# Altium PCB led1.PcbDoc
Units mil, origin at the board's own origin, x right, y up, seen from the top; angles counter-clockwise.
Board outline 6000 x 4000 mil, 2 copper layers (Top Layer, Bottom Layer); 26 components, 52 nets, 165 pads, 0 vias.
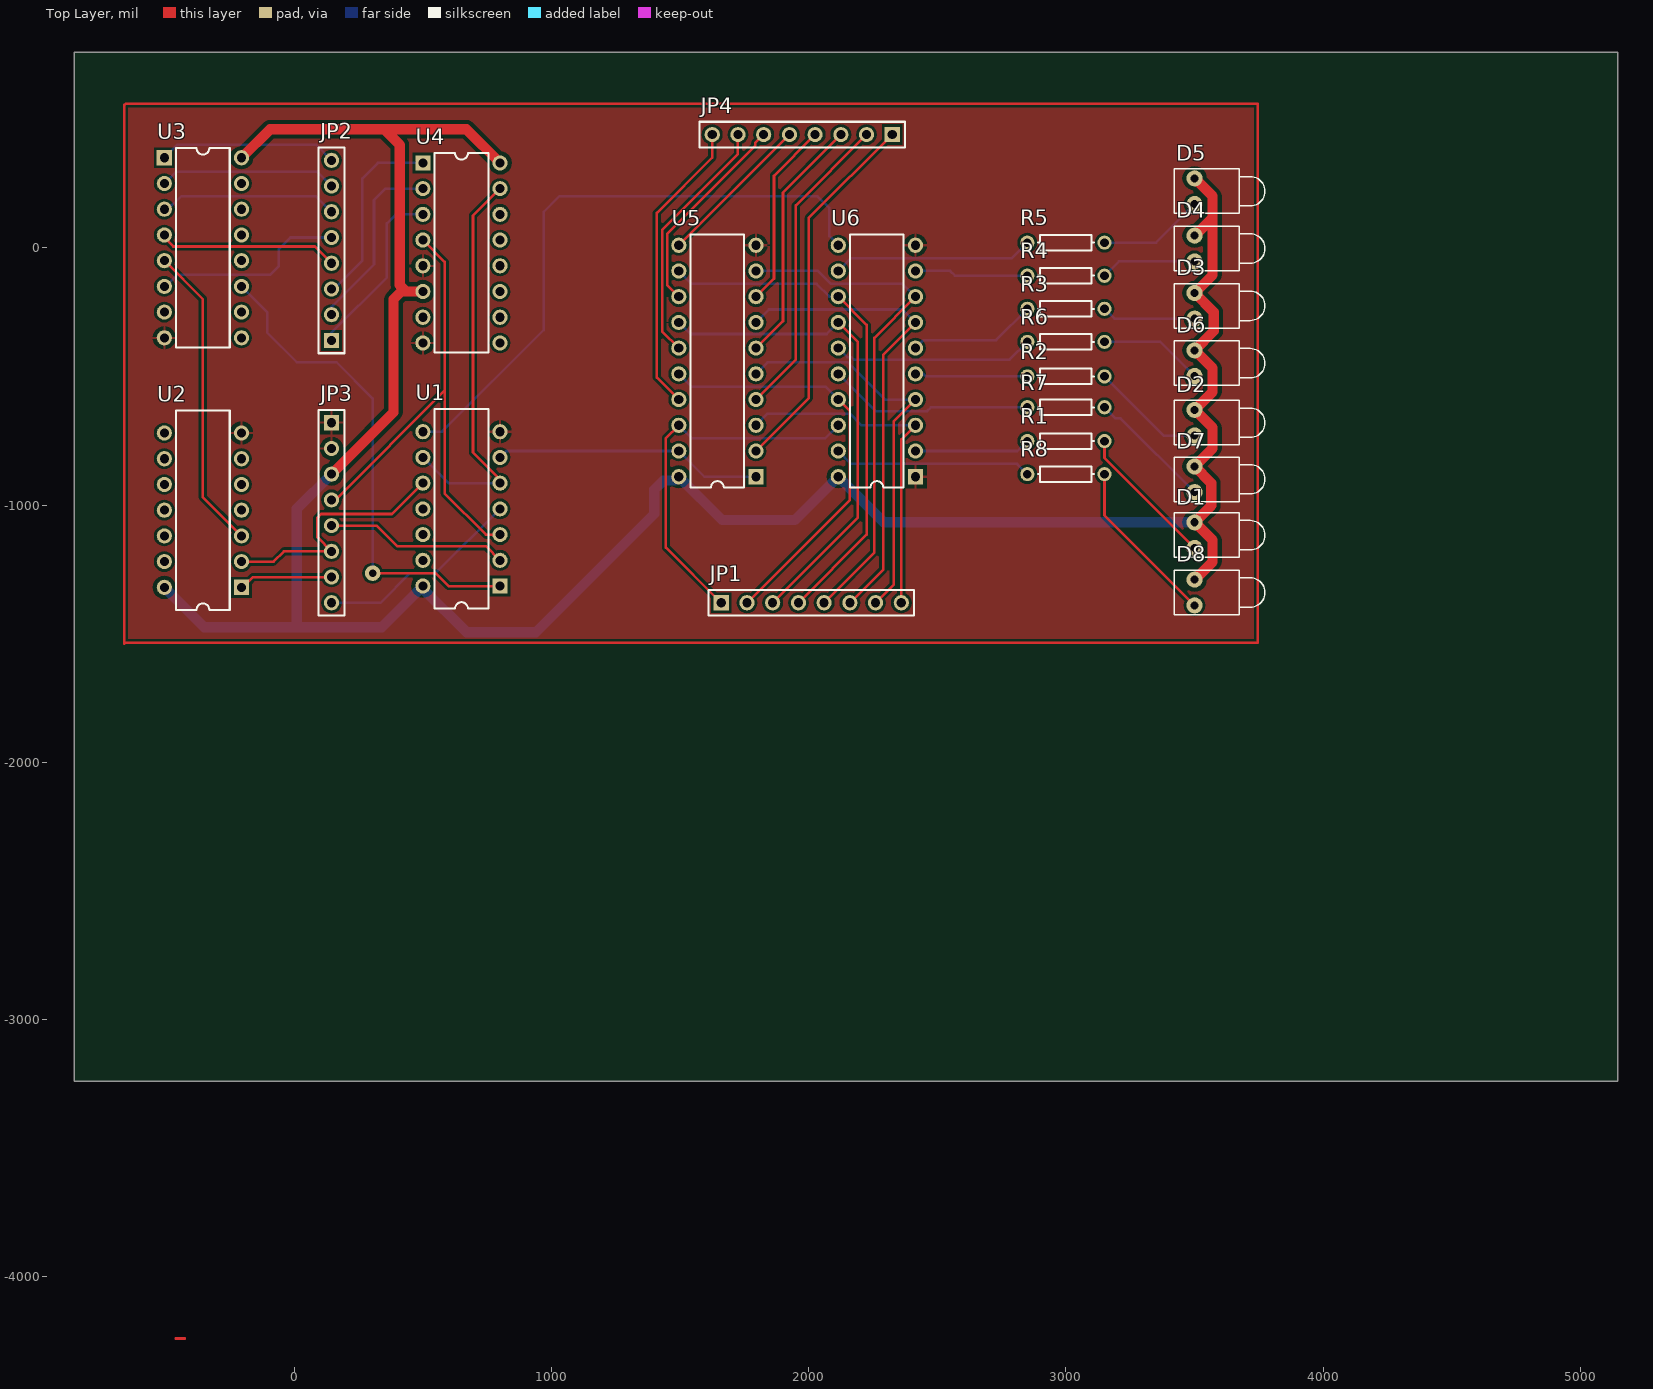
[diagram p0: Top Layer view]
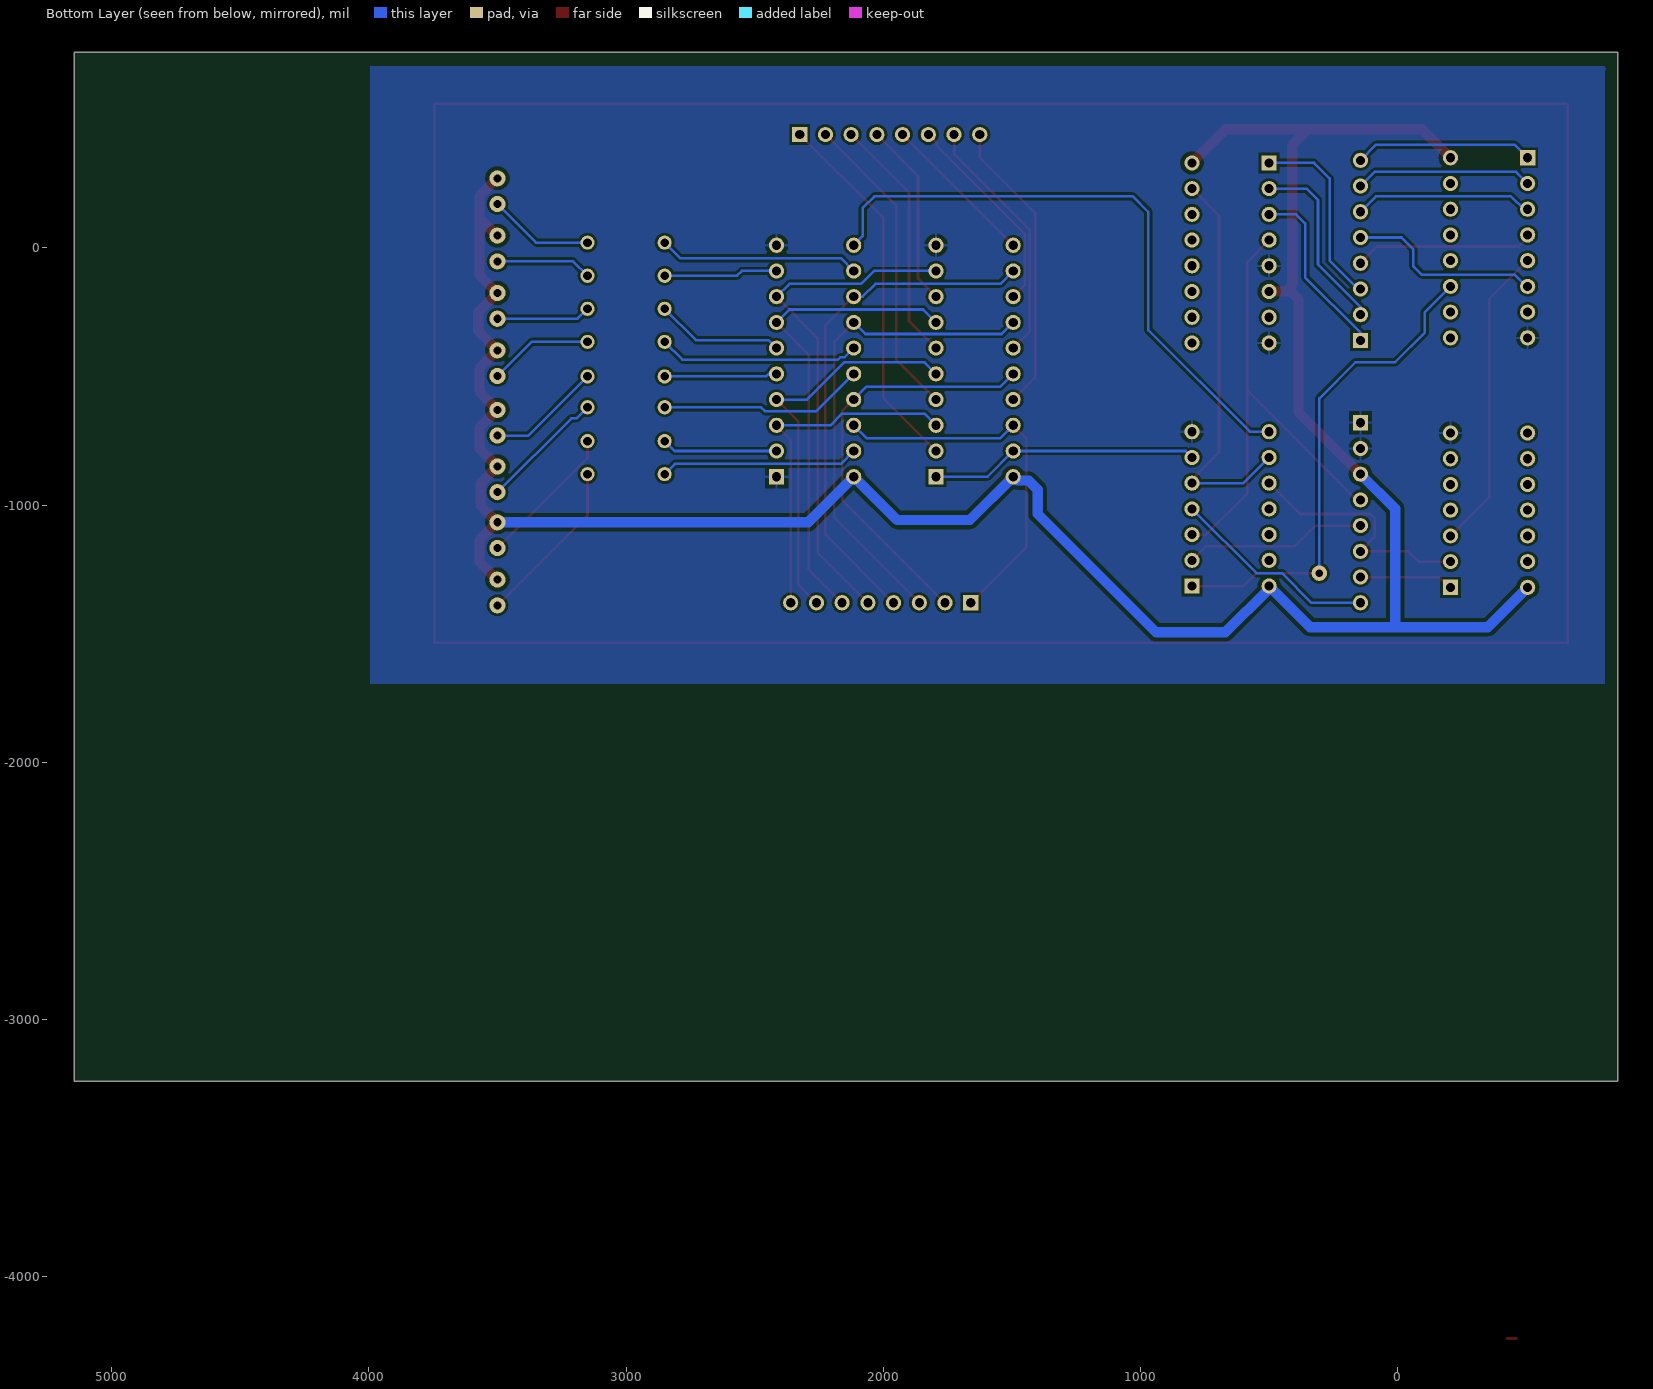
[diagram p1: Bottom Layer view, seen from below]

## Layer stack, top to bottom
Top Layer: signal copper 1.4
Dielectric: dielectric 12.6, FR-4, Dk 4.8
Bottom Layer: signal copper 1.4

## Board outline
-855,-3240 5145,-3240 5145,760 -855,760

## Design rules (kind name [scope] priority, off if disabled: settings)
Clearance vcc.c [InNetClass('vcc,gnd') vs InNetClass('vcc,gnd')] p1: gap=15
Clearance [All] p2: gap=10
ComponentClearance [All] p1: gap=10 collisioncheckmode=0
PolygonConnect [All] p1: connectstyle=Relief reliefconductorwidth=10 reliefentries=4 polygonreliefangle="90 Angle"
RoutingVias [All] p1: holewidth=28 width=50 viastyle="Through Hole" minholewidth=28 minwidth=50 maxholewidth=28 maxwidth=50
SolderMaskExpansion [All] p1: expansion=4
TestPointUsage [All] p1: valid=0 allowmultiple=FALSE
Testpoint [All] p1: side=15 testpointundercomponent=TRUE minsize=40 maxsize=100 preferedsize=60 minholesize=0 maxholesize=40 preferedholesize=32 testpointgrid=1 style=1023 order=1234567890
Width vcc [InNetClass('vcc,gnd')] p1: maxlimit=50 minlimit=30 preferedwidth=40
Width [All] p2: maxlimit=10 minlimit=10 preferedwidth=10
17 further rules are at their usual default settings.

## Classes and differential pairs
net class vcc,gnd: GND VCC
net class A[2..9]: A2 A3 A4 A5 A6 A7 A8 A9
net class D[0..7]: D0 D1 D2 D3 D4 D5 D6 D7
net class OUT[0..7]: OUT0 OUT1 OUT2 OUT3 OUT4 OUT5 OUT6 OUT7
net class SW[0..7]: SW0 SW1 SW2 SW3 SW4 SW5 SW6 SW7

## Components (designator, comment, footprint, x,y, rotation, side; value= is the part's Value field where it differs from the comment)
D1 "LED1" LED-1 3500,-1117.14 r0 top
D2 "LED1" LED-1 3500,-680 r0 top
D3 "LED1" LED-1 3500,-225.71 r0 top
D4 "LED1" LED-1 3500,-2.86 r0 top
D5 "LED1" LED-1 3500,220 r0 top
D6 "LED1" LED-1 3500,-448.57 r0 top
D7 "LED1" LED-1 3500,-900 r0 top
D8 "LED1" LED-1 3500,-1340 r0 top
JP1 "Header 8" HDR1X8 1660,-1380 r0 top
JP2 "Header 8" HDR1X8 145,-360 r90 top
JP3 "Header 8" HDR1X8 145,-680 r270 top
JP4 "Header 8" HDR1X8 2325,440 r180 top
R1 "Res1" AXIAL-0.3 3000,-751.43 r0 top
R2 "Res1" AXIAL-0.3 3000,-500 r180 top
R3 "Res1" AXIAL-0.3 3000,-237.14 r180 top
R4 "Res1" AXIAL-0.3 3000,-108.57 r180 top
R5 "Res1" AXIAL-0.3 3000,20 r180 top
R6 "Res1" AXIAL-0.3 3000,-365.71 r180 top
R7 "Res1" AXIAL-0.3 3000,-620 r180 top
R8 "Res1" AXIAL-0.3 3000,-880 r180 top
U1 "SN74LS32N" N014 650,-1015 r90 top
U2 "SN74LS08N" N014 -355,-1020 r90 top
U3 "SN74LS138N" N016 -355,0 r270 top
U4 "SN74LS138N" N016 650,-20 r270 top
U5 "SN74LS244N" N020 1645,-440 r90 top
U6 "SN74LS374N" N020D 2265,-440 r90 top

## Footprints (in the part's own frame and the unit in brackets; to place one, negate y for a bottom-side part, rotate by r counter-clockwise, add the part's x,y. Pads: shape width x height; smd on the part's side, far side on the other; paste and mask are expansions set on the pad)
AXIAL-0.3 [mm] "Resistor; 2 Leads"
  round 1.4 hole 0.85: 1(-3.81,0) 2(3.81,0)
  silkscreen extent -2.77,-0.76 2.77,0.76
HDR1X8 [mm] "Connector; Header; 8 Position"
  rect 1.5x1.5 hole 0.9: 1(0,0)
  round 1.5 hole 0.9: 2(2.54,0) 3(5.08,0) 4(7.62,0) 5(10.16,0) 6(12.7,0) 7(15.24,0) 8(17.78,0)
  silkscreen extent -1.27,-1.27 19.05,1.27
LED-1 [mm] "Typical RED GaAs LED; 2 Leads"
  round 1.6 hole 0.8: 1(0,1.27) 2(0,-1.27)
  silkscreen extent -2,-2.2 6.95,2.2
N014 [mm] "DIP; 14 Leads; Row Spacing 7.62 mm; Pitch 2.54 mm"
  rect 1.5x1.5 hole 0.9: 1(-7.62,-3.81)
  round 1.5 hole 0.9: 2(-5.08,-3.81) 3(-2.54,-3.81) 4(0,-3.81) 5(2.54,-3.81) 6(5.08,-3.81) 7(7.62,-3.81) 8(7.62,3.81) 9(5.08,3.81) 10(2.54,3.81) 11(0,3.81) 12(-2.54,3.81) 13(-5.08,3.81) 14(-7.62,3.81)
  silkscreen extent -9.85,-2.65 9.85,2.65
N016 [mm] "DIP; 16 Leads; Row Spacing 7.62 mm; Pitch 2.54 mm"
  rect 1.5x1.5 hole 0.9: 1(-8.89,-3.81)
  round 1.5 hole 0.9: 2(-6.35,-3.81) 3(-3.81,-3.81) 4(-1.27,-3.81) 5(1.27,-3.81) 6(3.81,-3.81) 7(6.35,-3.81) 8(8.89,-3.81) 9(8.89,3.81) 10(6.35,3.81) 11(3.81,3.81) 12(1.27,3.81) 13(-1.27,3.81) 14(-3.81,3.81) 15(-6.35,3.81) 16(-8.89,3.81)
  silkscreen extent -9.85,-2.65 9.85,2.65
N020 [mm] "DIP; 20 Leads; Row Spacing 7.62 mm; Pitch 2.54 mm"
  rect 1.5x1.5 hole 0.9: 1(-11.43,-3.81)
  round 1.5 hole 0.9: 2(-8.89,-3.81) 3(-6.35,-3.81) 4(-3.81,-3.81) 5(-1.27,-3.81) 6(1.27,-3.81) 7(3.81,-3.81) 8(6.35,-3.81) 9(8.89,-3.81) 10(11.43,-3.81) 11(11.43,3.81) 12(8.89,3.81) 13(6.35,3.81) 14(3.81,3.81) 15(1.27,3.81) 16(-1.27,3.81) 17(-3.81,3.81) 18(-6.35,3.81) 19(-8.89,3.81) 20(-11.43,3.81)
  silkscreen extent -12.5,-2.65 12.5,2.65
N020D [mm] "DIP; 20 Leads; Row Spacing 7.62 mm; Pitch 2.54 mm"
  rect 1.5x1.5 hole 0.9: 1(-11.43,-3.81)
  round 1.5 hole 0.9: 2(-8.89,-3.81) 3(-6.35,-3.81) 4(-3.81,-3.81) 5(-1.27,-3.81) 6(1.27,-3.81) 7(3.81,-3.81) 8(6.35,-3.81) 9(8.89,-3.81) 10(11.43,-3.81) 11(11.43,3.81) 12(8.89,3.81) 13(6.35,3.81) 14(3.81,3.81) 15(1.27,3.81) 16(-1.27,3.81) 17(-3.81,3.81) 18(-6.35,3.81) 19(-8.89,3.81) 20(-11.43,3.81)
  silkscreen extent -12.5,-2.65 12.5,2.65

## Part data
D1 D2 D3 D4 D5 D6 D7 D8: "Typical RED GaAs LED"
JP1 JP2 JP3 JP4: "Header, 8-Pin"
R1 R2 R3 R4 R5 R6 R7 R8: "Resistor"
U1: "Quadruple 2-Input Positive-OR Gate"
U2: "Quadruple 2-Input Positive-AND Gate"
U3 U4: "3-Line to 8-Line Decoder / Demultiplexer"
U5: "Octal Buffer and Line Driver with 3-State Outputs"
U6: "Octal D-Type Transparent Latches and Edge-Triggered Flip-Flop"

## Free pads (board coordinates)
  round 60 hole 30: 0(305,-1265)

## Nets (pads, with @x,y where several pads share a name; then routed paths per layer and width w, separated by ;. In a path a pad name is that pad's centre, name@x,y a point inside that pad or via, vN(x,y) a via of type N, cw(c..) or ccw(c..) an arc to the next point about the centre after c; other vN are vias at no path point)
A2: JP2.1 U4.3 | length 698.6
  Bottom Layer w10: JP2.1 145,-330 360,-115 360,95 395,130 U4.3
A3: JP2.2 U4.2 | length 722
  Bottom Layer w10: JP2.2 145,-230 310,-65 310,185 355,230 U4.2
A4: JP2.3 U4.1 | length 745.4
  Bottom Layer w10: JP2.3 155,-160 265,-50 265,270 325,330 U4.1
A5: JP2.4 U3.4 | length 701.4
  Top Layer w10: U3.4 -505,40 -470,5 80,5 JP2.4
A6: JP2.5 U3.6 | length 766.8
  Bottom Layer w10: U3.6 -500,-150 -455,-105 -95,-105 -60,-70 -60,-5 -15,40 JP2.5
A7: JP2.6 U3.3 | length 695.6
  Bottom Layer w10: U3.3 -490,150 -440,200 85,200 JP2.6
A8: JP2.7 U3.2 | length 691.4
  Bottom Layer w10: U3.2 -460,295 90,295 JP2.7
A9: JP2.8 U3.1 | length 696.4
  Bottom Layer w10: U3.1 -454,401 84,401 JP2.8
AEN: JP3.5 U1.2 | length 710.9
  Top Layer w10: JP3.5 320,-1080 400,-1160 745,-1160 U1.2
D0: JP1.8 U5.3 U6.3 | length 1370.1
  Top Layer w10: JP1.8 2360,-745 U6.3
  Bottom Layer w10: U5.3 1840,-645 2160,-645 2205,-690 U6.3
D1: JP1.7 U5.5 U6.4 | length 1552.5
  Top Layer w10: JP1.7 2330,-1310 2330,-675 U6.4
  Bottom Layer w10: U5.5 1839.53,-445.47 2152,-445.47 2296.53,-590 U6.4
D2: JP1.6 U5.7 U6.7 | length 1857
  Top Layer w10: JP1.6 2290,-1250 2290,-415 U6.7
  Bottom Layer w10: U5.7 1845,-240 2365,-240 U6.7
D3: JP1.5 U5.9 U6.8 | length 1998.5
  Top Layer w10: JP1.5 2255,-1185 2255,-350 U6.8
  Bottom Layer w10: U5.9 2036,-90 2086,-140 2365,-140 U6.8
D4: JP1.4 U5.12 U6.13 | length 2006.8
  Top Layer w10: JP1.4 2225,-1115 2225,-300 U6.13
  Bottom Layer w10: U5.12 1545,-140 2030.47,-140 2080.47,-190 U6.13
D5: JP1.3 U5.14 U6.14 | length 1915
  Top Layer w10: JP1.3 2190,-1050 2190,-365 U6.14
  Bottom Layer w10: U5.14 1540,-335 2070,-335 U6.14
D6: JP1.2 U5.16 U6.17 | length 1635.7
  Top Layer w10: JP1.2 2160,-980 2160,-635 U6.17
  Bottom Layer w10: U5.16 1545,-540 2065,-540 U6.17
D7: JP1.1 U5.18 U6.18 | length 1461.2
  Top Layer w10: U5.18 1445,-740 1445,-1165 JP1.1
  Bottom Layer w10: U5.18 1545,-740 2065,-740 U6.18
DEN: JP3.4 U1.3 U4.4 | length 1917.5
  Top Layer w10: JP3.4 160,-980 585,-555 ; U4.4 585,-55 585,-955 745,-1115 U1.3
DIR: JP3.8 U1.4 | length 806.2
  Bottom Layer w10: JP3.8 335,-1380 450,-1265 550,-1265 U1.4
GND: JP3.1 JP3.2 U1.7 U2.7 U3.8 U4.5 U4.8 U5.10 U6.1 U6.10
IOR: JP3.7 U2.1 | length 366.6
  Top Layer w10: U2.1 -200,-1320 -160,-1280 JP3.7
IOW: JP3.6 U1.10 U2.2 | length 985.3
  Top Layer w10: U2.2 -80,-1220 -40,-1180 JP3.6 90,-1125 90,-1050 105,-1035 380,-1035 U1.10
NetD1_2: D1.2 R1.2 | length 560.7
  Top Layer w10: R1.2 3150,-817.14 D1.2
NetD2_2: D2.2 R2.1 | length 445.3
  Bottom Layer w10: R2.1 3380,-730 D2.2
NetD3_2: D3.2 R3.1 | length 366
  Bottom Layer w10: R3.1 3188.57,-275.71 D3.2
NetD4_2: D4.2 R4.1 | length 373.1
  Bottom Layer w10: R4.1 3205.71,-52.86 D4.2
NetD5_2: D5.2 R5.1 | length 412.1
  Bottom Layer w10: R5.1 3350,20 D5.2
NetD6_2: D6.2 R6.1 | length 405
  Bottom Layer w10: R6.1 3367.14,-365.71 D6.2
NetD7_2: D7.2 R7.1 | length 486.7
  Bottom Layer w10: R7.1 3193,-663 3213,-663 D7.2
NetD8_2: D8.2 R8.1 | length 655
  Top Layer w10: R8.1 3150,-1040 D8.2
NetU1_1: pad.0 U1.1 U3.11 | length 1932.8
  Top Layer w10: pad.0 550,-1265 600,-1315 U1.1
  Bottom Layer w10: U3.11 -105,-250 -105,-330 10,-445 165,-445 305,-585 pad.0
NetU1_5: U1.5 U1.9 U4.15 | length 1573.4
  Top Layer w10: U1.5 800,-900 695,-795 695,125 U4.15
  Bottom Layer w10: U1.9 600,-915 U1.5
NetU1_6: U1.6 U5.1 U5.19 | length 1046.8
  Bottom Layer w10: U1.6 825,-790 U5.19 1595,-890 U5.1
NetU1_8: U1.8 U6.11 | length 2406.6
  Bottom Layer w10: U1.8 575,-715 970,-320 970,140 1030,200 2035,200 2080,155 2080,45 U6.11
NetU2_3: U2.3 U3.5 | length 1194.3
  Top Layer w10: U3.5 -355,-200 -355,-970 U2.3
OUT0: R1.1 U6.2 | length 451
  Bottom Layer w10: U6.2 2811.43,-790 R1.1
OUT1: R2.2 U6.5 | length 439.1
  Bottom Layer w10: U6.5 2446,-490 2456,-500 R2.2
OUT2: R3.2 U6.6 | length 498.3
  Bottom Layer w10: U6.6 2446,-359 2728.14,-359 R3.2
OUT3: R4.2 U6.9 | length 442.7
  Bottom Layer w10: U6.9 2550,-90 2568.57,-108.57 R4.2
OUT4: R5.2 U6.12 | length 780.6
  Bottom Layer w10: U6.12 2165,-40 2790,-40 R5.2
OUT5: R6.2 U6.15 | length 782.3
  Bottom Layer w10: U6.15 2150.47,-425.47 2166.97,-425.47 2176.5,-435 2780.71,-435 R6.2
OUT6: R7.2 U6.16 | length 801.3
  Bottom Layer w10: U6.16 2260,-635 2460,-635 2475,-620 R7.2
OUT7: R8.2 U6.19 | length 772.3
  Bottom Layer w10: U6.19 2165,-840 2810,-840 R8.2
SW0: JP4.8 U5.17 | length 1154.3
  Top Layer w10: U5.17 1410,-505 1410,136 1625,351 JP4.8
SW1: JP4.7 U5.15 | length 979.1
  Top Layer w10: U5.15 1430,-325 1430,69 1725,364 JP4.7
SW2: JP4.6 U5.13 | length 804
  Top Layer w10: U5.13 1450,-145 1450,54 1792,396 1792,407 JP4.6
SW3: JP4.5 U5.11 | length 608.1
  Top Layer w10: U5.11 JP4.5
SW4: JP4.4 U5.8 | length 725.3
  Top Layer w10: U5.8 1865,-120 1865,280 JP4.4
SW5: JP4.3 U5.6 | length 966.7
  Top Layer w10: U5.6 1900,-285 1900,215 JP4.3
SW6: JP4.2 U5.4 | length 1208.1
  Top Layer w10: U5.4 1950,-435 1950,165 JP4.2
SW7: JP4.1 U5.2 | length 1449.5
  Top Layer w10: U5.2 2000,-585 2000,115 JP4.1
VCC: D1.1 D2.1 D3.1 D4.1 D5.1 D6.1 D7.1 D8.1 JP3.3 U1.14 U2.14 U3.16 U4.6 U4.16 U5.20 U6.20 | length 10070.6
  Top Layer w40: U3.16 -94,461 349.47,461 ; JP3.3 386.04,-638.95 386.04,-200 416.04,-170 435.47,-170 ; U4.6 435.47,-170 ; U4.16 669,461 349.47,461 ; D8.1 3570,-1220 3570,-1137.14 D1.1 3565,-1002.14 3565,-915 D7.1 3570,-780 3570,-700 D2.1 3570,-560 3570,-468.57 D6.1 3575,-323.57 3575,-250.71 D3.1 3570,-105.71 3570,117.14 ; D4.1 3570,117.14 ; D5.1 3570,200 3570,117.14 ; 349.47,461 410.47,400 410.47,-145 435.47,-170
  Bottom Layer w40: U2.14 -350,-1475 10,-1475 ; JP3.3 10,-1015 10,-1475 ; D1.1 2292.14,-1067.14 U6.20 1947,-1058 1663,-1058 U5.20 1480,-905 1435,-905 1400,-940 1400,-1035 940,-1495 670,-1495 500,-1325 U1.14 340,-1475 10,-1475
pads on no net: U1.11 U1.12 U1.13 U2.4 U2.5 U2.6 U2.8 U2.9 U2.10 U2.11 U2.12 U2.13 U3.7 U3.9 U3.10 U3.12 U3.13 U3.14 U3.15 U4.7 U4.9 U4.10 U4.11 U4.12 U4.13 U4.14
copper on no net: | length 13032.1
  Top Layer w10: -660,-1540 -660,555 -655,560 3745,560 3745,-1535 -655,-1535 ; -460,-4240 -425,-4240

## Polygon pours and split planes (outlines as drawn)
GND on Top Layer (solid, remove dead copper): -795,685 -795,-1685 3890,-1685 3890,700 -790,700
GND on Bottom Layer (solid, remove dead copper): -805,685 -805,-1695 3995,-1695 3995,705 -810,705

## Silkscreen, mask and mechanical layers (free items; w line width, h text height)
Mechanical 1:
  lines w10: 3835,-1630 3845,-1640 ; 3845,-1640 3845,660 -755,660 -755,-1640 3845,-1640